# Altium PCB Main.PcbDoc
Units mm, origin at the board's own origin, x right, y up, seen from the top; angles counter-clockwise.
Board outline 49.28 x 20.45 mm, 4 copper layers (Top Layer, L2 (GND), L3 (GND), Bottom Layer), stack 0.567 mm thick; 38 components, 33 nets, 163 pads, 95 vias.
Unrouted connection lines stored in the file: 91.
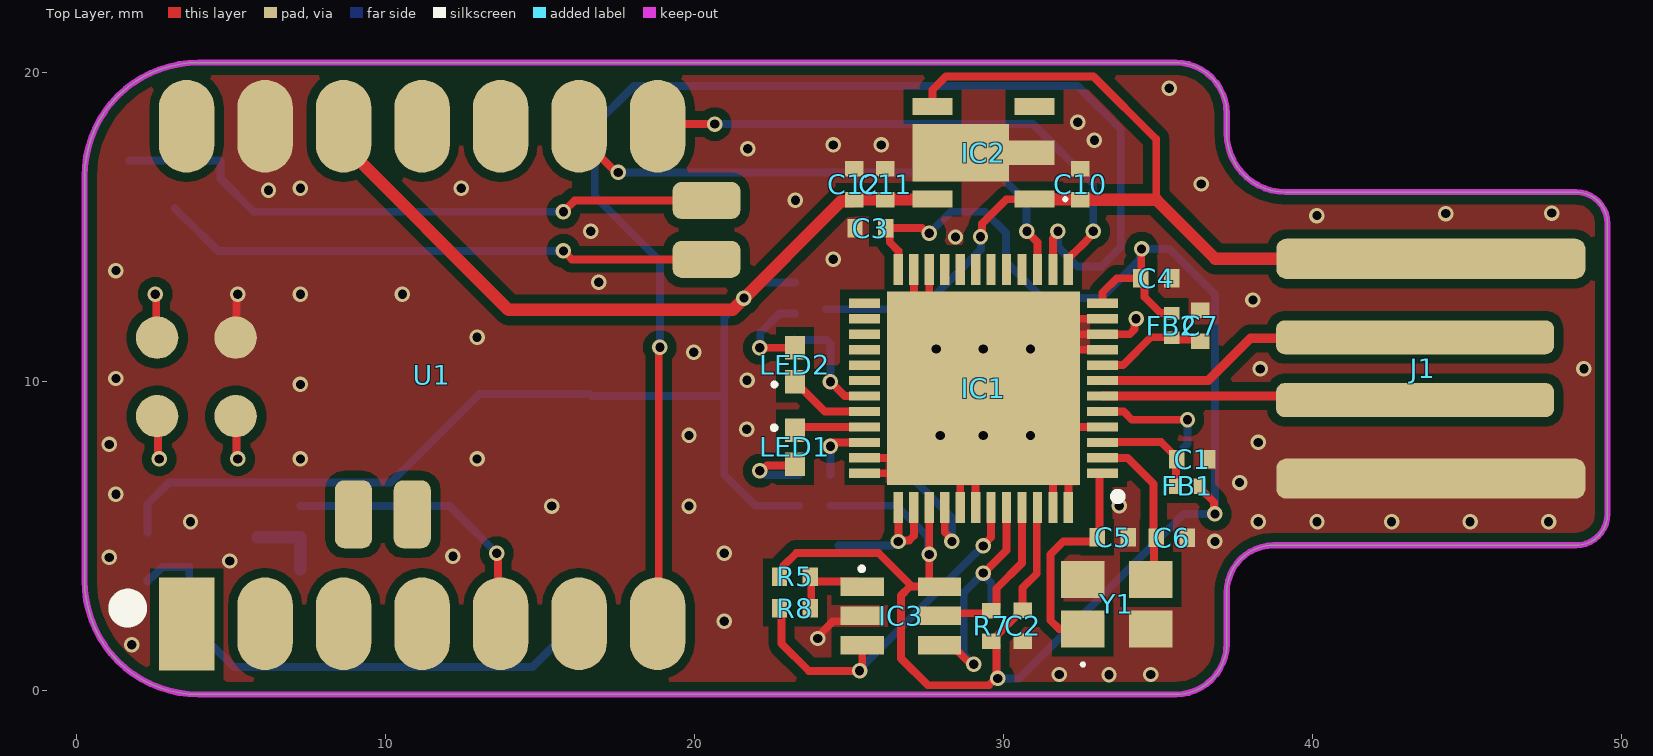
[diagram p0: Top Layer view]
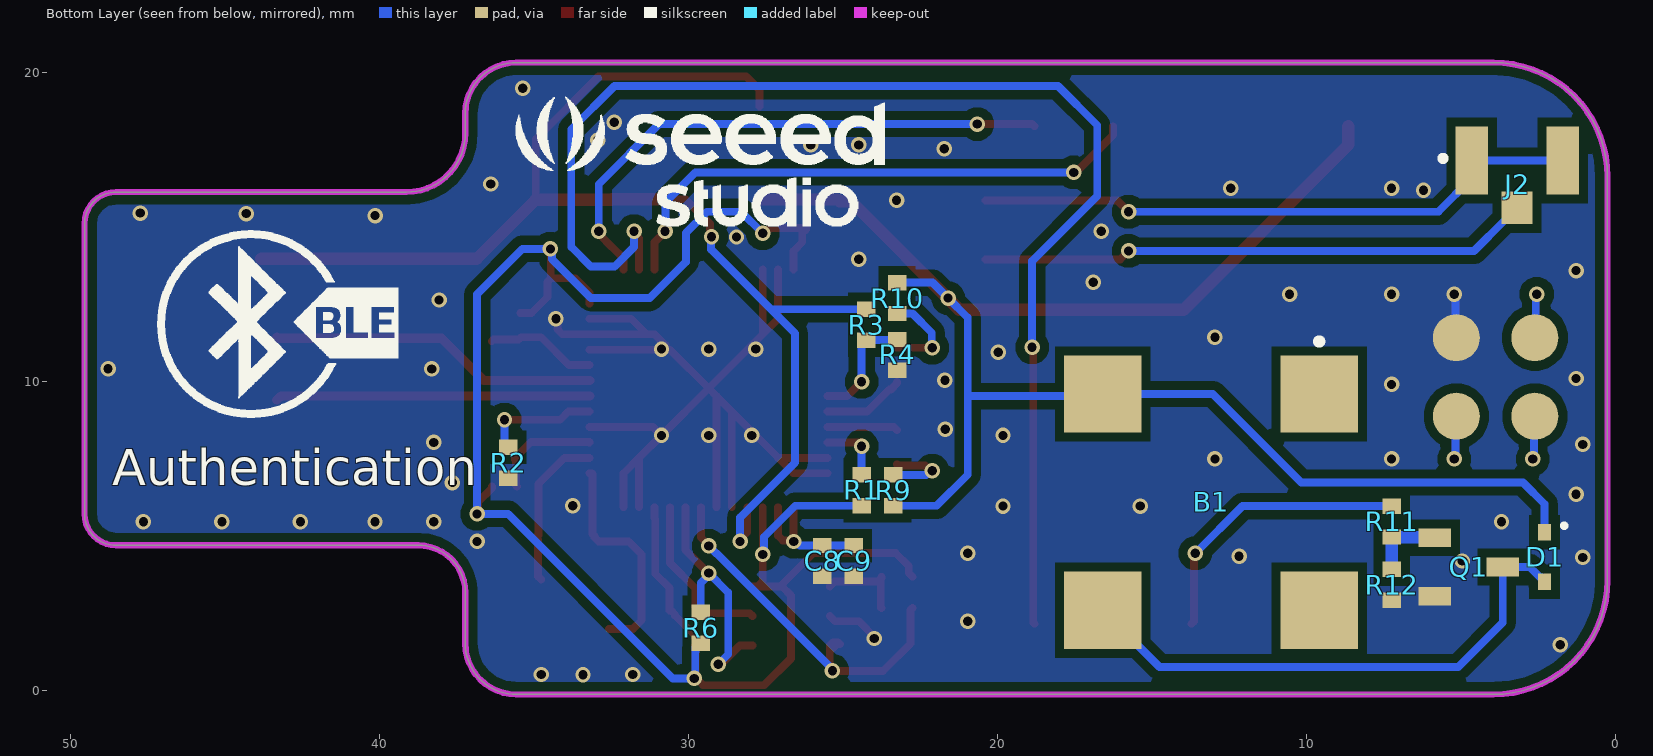
[diagram p1: Bottom Layer view, seen from below]
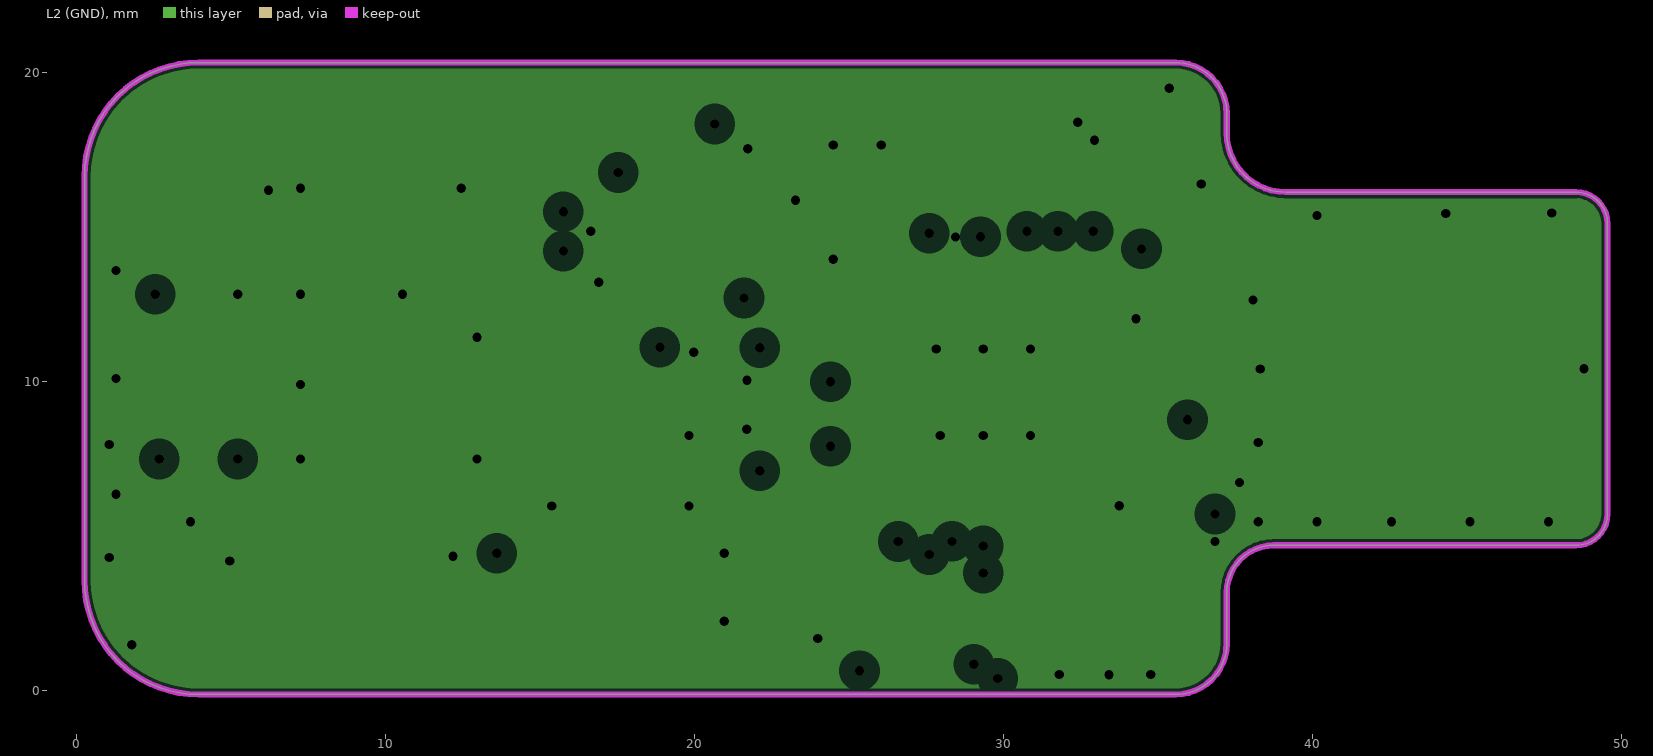
[diagram p2: L2 (GND), clearances drawn from the general rule]
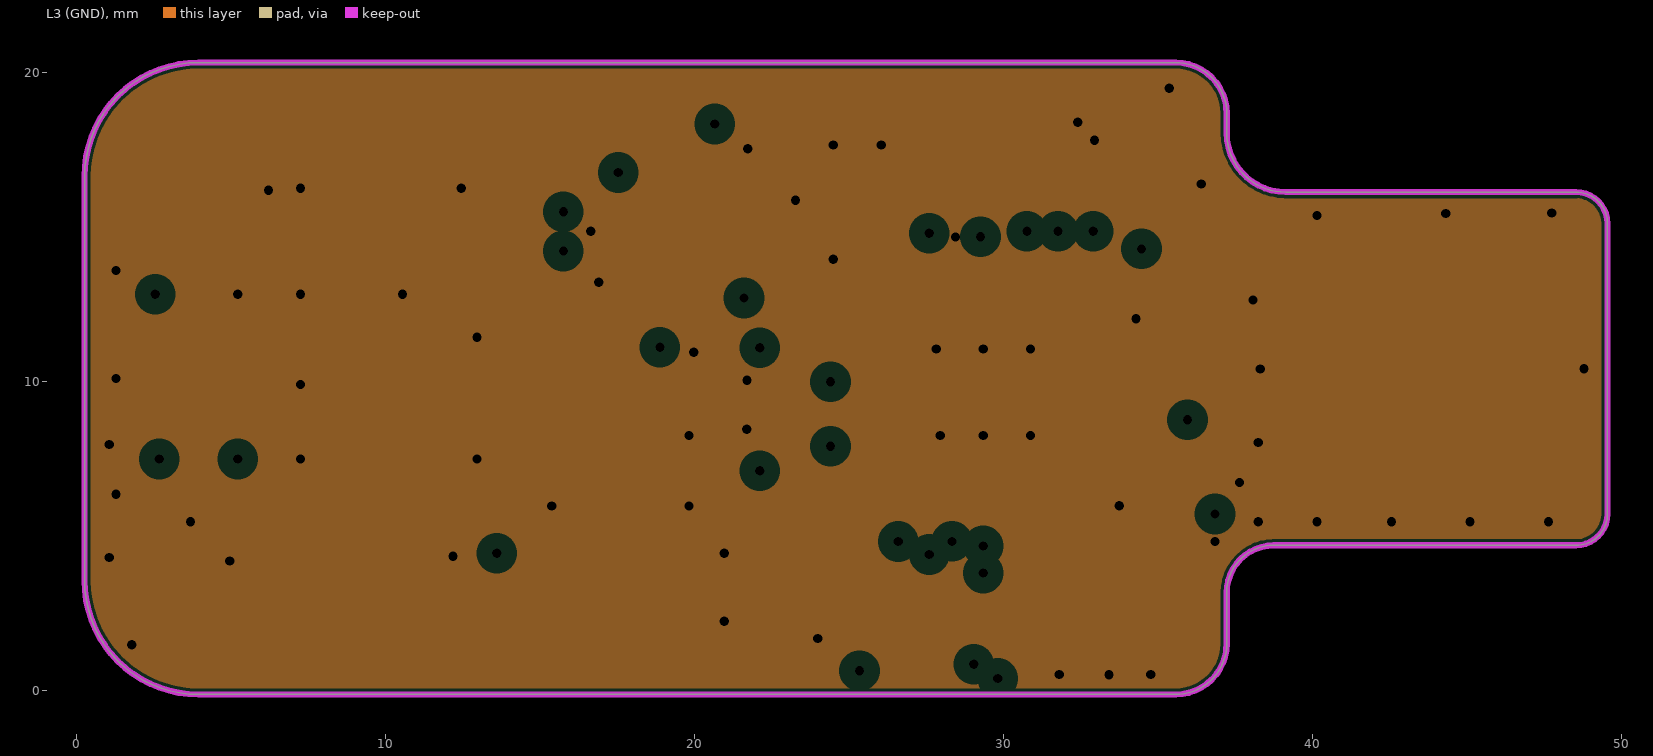
[diagram p3: L3 (GND), clearances drawn from the general rule]

## Layer stack, top to bottom
Top Solder: solder mask 0.0102, Solder Resist, Dk 3.5
Top Layer: signal copper 0.035
Dielectric 2: prepreg 0.0711, PP-006, Dk 4.1
L2 (GND): plane copper 0.0175, net GND
Dielectric 1: dielectric 0.32, FR-4, Dk 4.8
L3 (GND): plane copper 0.0175, net GND
Dielectric 3: prepreg 0.0711, PP-006, Dk 4.1
Bottom Layer: signal copper 0.035
Bottom Solder: solder mask 0.0102, Solder Resist, Dk 3.5

## Board outline
49.53,15.113 49.53,5.715 cw(c48.514,5.715) 48.514,4.699 38.735,4.699 ccw(c38.735,3.175) 37.211,3.175 37.211,1.524 cw(c35.56,1.524) 35.56,-0.127 3.937,-0.127 cw(c3.937,3.556) 0.254,3.556 0.254,16.637 cw(c3.937,16.637) 3.937,20.32 35.56,20.32 cw(c35.56,18.669) 37.211,18.669 37.211,18.034 ccw(c39.116,18.034) 39.116,16.129 48.514,16.129 cw(c48.514,15.113)

## Design rules (kind name [scope] priority, off if disabled: settings)
Clearance Clearance_1 [InNamedPolygon('GND_L01_P004')] p1: gap=0.3 ignorepadtopadclearanceinfootprint=FALSE
Clearance [All] p2: gap=0.3 ignorepadtopadclearanceinfootprint=FALSE
DiffPairsRouting [All] p1: maxlimit=0.254 minlimit=0.25 mostfreqgap=0.25 toplayer_minwidth=0.287 toplayer_maxwidth=0.287 toplayer_prefwidth=0.287 bottomlayer_minwidth=0.287 bottomlayer_maxwidth=0.287 bottomlayer_prefwidth=0.287 maxuncoupledlength=12.7
HoleSize [All] p1: absolutevalues=TRUE maxlimit=2.54 minlimit=0.3 maxpercent=80.000 minpercent=20.000
MinimumSolderMaskSliver [All] p1: minsoldermaskwidth=0.1
PlaneClearance [All] p1: clearance=0.508
PlaneConnect [All] p1: planeconnectstyle=Direct reliefexpansion=0.508 reliefentries=4 reliefconductorwidth=0.254 reliefairgap=0.254
PolygonConnect [All] p1: connectstyle=Direct reliefconductorwidth=0.254 reliefentries=4 polygonreliefangle="90 Angle" airgapwidth=0.254
RoutingVias [All] p1: holewidth=0.5 width=0.7 viastyle="Through Hole" minholewidth=0.3 minwidth=0.5 maxholewidth=6 maxwidth=7
SilkToSolderMaskClearance [IsPad] p1: minsilkscreentomaskgap=0.15 clearancetoexposedcopper=TRUE
SolderMaskExpansion [All] p1: expansion=0.1 istentingtop=FALSE
UnRoutedNet [All] p1: checkbadconnections=TRUE
Width [All] p1: maxlimit=2 minlimit=0.254 preferedwidth=0.4
23 further rules are at their usual default settings.

## Classes and differential pairs
differential pair USB: +USB_P -USB_N

## Components (designator, comment, footprint, x,y, rotation, side; value= is the part's Value field where it differs from the comment)
B1 "Buzzer" CMT8530SSMTTR 13.081,6.096 r0 bottom
C1 "10uF" "CAP 0402_1005" 36.099,7.484 r180 top
C2 "10uF" "CAP 0402_1005" 30.598,2.093 r270 top
C3 "100nF" "CAP 0402_1005" 25.684,14.967 r180 top
C4 "100nF" "CAP 0402_1005" 34.929,13.335 r0 top
C5 "18pF" "CAP 0402_1005" 33.528,4.962 r180 top
C6 "18pF" "CAP 0402_1005" 35.433,4.956 r180 top
C7 "10uF" "CAP 0402_1005" 36.347,11.805 r270 top
C8 "100nF" "CAP 0402_1005" 25.654,4.191 r90 bottom
C9 "100nF" "CAP 0402_1005" 24.638,4.191 r90 bottom
C10 "10uF" "CAP 0402_1005" 32.468,16.383 r270 top
C11 "100nF" "CAP 0402_1005" 26.162,16.383 r270 top
C12 "10uF" "CAP 0402_1005" 25.146,16.383 r270 top
D1 "DIODE" SODFL1608X65N 2.286,4.318 r270 bottom
FB1 "BLM15AX601SN1D" NFZ15SG152SN10B 35.941,6.604 r0 top
FB2 "BLM15AX601SN1D" NFZ15SG152SN10B 35.433,11.811 r90 top
IC1 "FT232HQ-REEL" QFN50P800X800X100-49N-D 29.337,9.779 r180 top locked
IC2 "AP2112R5A-3.3TRG1" AP2112R5A33TRG1 29.337,17.399 r90 top
IC3 "93LC56BT-I_OT" SOT95P270X145-6N 26.67,2.413 r0 top
J1 "USB1046-GF-0190-L-B-A" USB1046GF0190LBA 49.53,4.699 r0 top
J2 "U.FL-R-SMT-1_01_" U.FL-R-SMT(01) 3.175,17.145 r180 bottom
LED1 "150040VS73240" LEDC1005X50N 23.241,7.874 r270 top
LED2 "LW_QH8G-Q2OO-3K5L-1" LEDC1005X40N 23.241,10.541 r90 top
Q1 "2N7002NXAKR" SOT95P230X110-3N 4.742,3.998 r180 bottom
R1 "12K" "RES 0402_1005" 24.384,6.477 r270 bottom
R2 "12K" "RES 0402_1005" 35.814,7.366 r90 bottom
R3 "5.1K" "RES 0402_1005" 24.243,11.835 r90 bottom
R4 "12K" "RES 0402_1005" 23.233,10.858 r90 bottom
R5 "10K" "RES 0402_1005" 23.241,3.683 r180 top
R6 "10K" "RES 0402_1005" 29.591,2.032 r270 bottom
R7 "10K" "RES 0402_1005" 29.598,2.088 r270 top
R8 "2K" "RES 0402_1005" 23.241,2.667 r0 top
R9 "1K" "RES 0402_1005" 23.368,6.477 r90 bottom
R10 "1K" "RES 0402_1005" 23.241,12.7 r270 bottom
R11 "180" "RES 0402_1005" 7.239,5.469 r90 bottom
R12 "10K" "RES 0402_1005" 7.239,3.429 r90 bottom
U1 "nRF52840" XIAO_nRF52840 11.112,9.126 r90 top locked
Y1 "ABM8AIG-12.000MHZ-1Z-TR" ABM8AIG12000MHZ1ZTR 33.655,2.794 r0 top

## Footprints (in the part's own frame and the unit in brackets; to place one, negate y for a bottom-side part, rotate by r counter-clockwise, add the part's x,y. Pads: shape width x height; smd on the part's side, far side on the other; paste and mask are expansions set on the pad)
ABM8AIG12000MHZ1ZTR [mm]
  rect 1.4x1.2 smd: 1(-1.1,-0.8) 2(1.1,-0.8) 3(1.1,0.8) 4(-1.1,0.8)
  silkscreen extent -1.15,-2 -1.05,-1.9, body extent -1.68,-1.28 1.68,1.28, height 0.9
AP2112R5A33TRG1 [mm]
  rect 0.55x1.3 smd: 1(-1.5,-1.65) 3(1.5,-1.65) 4(1.5,1.65) 5(-1.5,1.65)
  rect 0.8x1.475 smd: 2(0,-1.563)
  rect 1.85x3.125 smd: 6(0,0.737)
  silkscreen extent -1.55,-2.7 -1.45,-2.6, body extent -2.25,-1.22 2.25,1.22, height 1.7
"CAP 0402_1005" [mm] "Chip Capacitor, 2-Leads, Body 1.02x0.51mm, IPC Medium Density"
  rect 0.5x0.6 smd: 1(-0.498,0.006) 2(0.502,0.006)
  body extent -0.52,-0.27 0.48,0.25, height 0.52
CMT8530SSMTTR [mm]
  rect 2.5x2.5 smd: 1(-3.5,-3.5) 2(3.5,-3.5) 3(3.5,3.5) 4(-3.5,3.5)
  silkscreen extent -3.6,-5.3 -3.4,-5.1, body extent -4.25,-4.19 4.25,4.31, height 3.01
LEDC1005X40N [mm]
  rect 0.75x0.65 smd: 1(-0.55,0) 2(0.55,0)
  body extent -0.53,-0.25 0.47,0.25, height 0.36
LEDC1005X50N [mm]
  rect 0.75x0.65 smd: 1(-0.55,0) 2(0.55,0)
  body extent -0.5,-0.25 0.5,0.25, height 0.4
NFZ15SG152SN10B [mm]
  rect 0.4x0.5 smd: 1(-0.4,0) 2(0.4,0)
  body extent -0.5,-0.25 0.5,0.25, height 0.5
QFN50P800X800X100-49N-D [mm]
  rect 1x0.3 smd: 1(-3.85,2.75) 2(-3.85,2.25) 3(-3.85,1.75) 4(-3.85,1.25) 5(-3.85,0.75) 6(-3.85,0.25) 7(-3.85,-0.25) 8(-3.85,-0.75) 9(-3.85,-1.25) 10(-3.85,-1.75) 11(-3.85,-2.25) 12(-3.85,-2.75) 25(3.85,-2.75) 26(3.85,-2.25) 27(3.85,-1.75) 28(3.85,-1.25) 29(3.85,-0.75) 30(3.85,-0.25) 31(3.85,0.25) 32(3.85,0.75) 33(3.85,1.25) 34(3.85,1.75) 35(3.85,2.25) 36(3.85,2.75)
  rect 0.3x1 smd: 13(-2.75,-3.85) 14(-2.25,-3.85) 15(-1.75,-3.85) 16(-1.25,-3.85) 17(-0.75,-3.85) 18(-0.25,-3.85) 19(0.25,-3.85) 20(0.75,-3.85) 21(1.25,-3.85) 22(1.75,-3.85) 23(2.25,-3.85) 24(2.75,-3.85) 37(2.75,3.85) 38(2.25,3.85) 39(1.75,3.85) 40(1.25,3.85) 41(0.75,3.85) 42(0.25,3.85) 43(-0.25,3.85) 44(-0.75,3.85) 45(-1.25,3.85) 46(-1.75,3.85) 47(-2.25,3.85) 48(-2.75,3.85)
  rect 6.25x6.25 smd paste-40: 49(0,0)
  silkscreen extent -4.47,3.38 -4.23,3.62, body extent -4.05,-4.05 4.05,4.05, height 1
"RES 0402_1005" [mm] "Chip Resistor, 2-Leads, Body 1.0x0.5mm, IPC Medium Density"
  rect 0.5x0.6 smd: 1(-0.5,0) 2(0.5,0)
  body extent -0.5,-0.25 0.5,0.25, height 0.35
SODFL1608X65N [mm]
  rect 0.53x0.42 smd: 1(-0.8,0) 2(0.8,0)
  body extent -0.8,-0.42 0.8,0.41, height 0.63
SOT95P230X110-3N [mm]
  rect 1.05x0.6 smd: 1(-1.1,0.95) 2(-1.1,-0.95) 3(1.1,0)
  body extent -1.2,-1.45 1.2,1.45, height 0.95
SOT95P270X145-6N [mm]
  rect 1.4x0.6 smd: 1(-1.25,0.95) 2(-1.25,0) 3(-1.25,-0.95) 4(1.25,-0.95) 5(1.25,0) 6(1.25,0.95)
  body extent -1.35,-1.45 1.35,1.45, height 1.45
U.FL-R-SMT(01) [mm]
  rect 1.05x2.2 smd: 1(-1.475,0) 2(1.475,0)
  rect 1x1.05 smd: 3(0,-1.525)
  silkscreen extent -2.46,0.02 -2.35,0.13, body extent -1.76,-1.8 1.24,1.3, height 1.25
USB1046GF0190LBA [mm]
  rrect50% 10x1.3 smd: 1(-5.715,9.271) 4(-5.715,2.159)
  rrect50% 9x1.1 smd: 2(-6.223,6.731) 3(-6.223,4.699)
XIAO_nRF52840 [mm]
  rect 3x1.8 smd: 1(-6.972,7.556)
  oval 3x1.8 smd: 2(-6.967,5.016) 3(-6.967,2.476) 4(-6.967,-0.064) 5(-6.967,-2.604) 6(-6.967,-5.144) 7(-6.967,-7.683) 8(9.134,-7.683) 9(9.134,-5.143) 10(9.134,-2.603) 11(9.134,-0.063) 12(9.134,2.477) 13(9.134,5.017) 14(9.134,7.556)
  round 1.37 smd: 15(2.291,8.509) 16(-0.249,8.509) 17(-0.249,5.969) 18(2.291,5.969)
  rrect50% 2.2x1.2 smd: 19(-3.424,2.159) 20(-3.424,0.254)
  rrect50% 1.2x2.2 smd: 21(4.826,-9.266) 22(6.731,-9.266)
  silkscreen extent -6.59,9.33 -6.33,9.59, body extent -7.75,-10.57 9.75,11.43, height 4.41

## Part data
B1: library part CMT-8530S-SMT-TR, "Speakers & Transducers Buzzer 8.5mm sq 2.73kHz 3.6V SMT", Manufacturer_Name="CUI Devices", Mouser Part Number=490-CMT-8530S-SMT-TR, Datasheet Link=https://datasheet.datasheetarchive.com/originals/distributors/DKDS-12/236652.pdf, Geometry.Height=3mm, Manufacturer_Part_Number=CMT-8530S-SMT-TR, Mouser Price/Stock=https://www.mouser.co.uk/ProductDetail/CUI-Devices/CMT-8530S-SMT-TR/?qs=qCxwlXJ4fnxl6A4lXsnRBQ%3D%3D
C1 C2 C7 C10 C12: library part "Cap 0402", "Multilayer Ceramic Capacitors MLCC - SMD/SMT NEW GLOBAL PN KGM05CR51A106MH 10V 10uF X5R 0402 2mm Pitch 20%", ComponentLink1Description="New link", ComponentLink1URL=https://eu.mouser.com/ProductDetail/KYOCERA-AVX/CM05X5R106M10AH?qs=MyNHzdoqoQKSCgSEDR5Ylg%3D%3D
C3 C4 C8 C9 C11: library part "Cap 0402", "Multilayer Ceramic Capacitors MLCC - SMD/SMT 0402 16VDC 100nF 10% X7R", ComponentLink1Description="New link", ComponentLink1URL=https://eu.mouser.com/ProductDetail/TDK/C1005X7R1C104K050BC?qs=NRhsANhppD%252BhAGOapA8QKQ%3D%3D
C5 C6: library part "Cap 0402", "Multilayer Ceramic Capacitors MLCC - SMD/SMT 16V 18pF X8R 0402 2% AEC-Q200", ComponentLink1Description="New link", ComponentLink1URL=https://eu.mouser.com/ProductDetail/KEMET/C0402C180G4HACAUTO?qs=j%252B1pi9TdxUYvGKJw1Hletg%3D%3D
D1: library part BAS716_115, "Rectifiers DIODE LOW LEAKAGE TAPE-7", Manufacturer_Name=Nexperia, Manufacturer_Part_Number=BAS716,115, Mouser Part Number=771-BAS716-T/R, Datasheet Link=https://assets.nexperia.com/documents/data-sheet/BAS716.pdf, Geometry.Height=0.65mm, Mouser Price/Stock=https://www.mouser.co.uk/ProductDetail/Nexperia/BAS716115?qs=me8TqzrmIYUJEW4Ty445kw%3D%3D
FB1 FB2: "Ferrite Bead", Manufacturer_Name="Murata Electronics", Mouser Part Number=81-BLM15AX601SN1D, Arrow Part Number=BLM15AX601SN1D, Arrow Price/Stock=https://www.arrow.com/en/products/blm15ax601sn1d/murata-manufacturing?region=europe, ComponentLink1Description="New link", ComponentLink1URL=https://eu.mouser.com/ProductDetail/Murata-Electronics/BLM15AX601SN1D?qs=MY6wChARw2zrjX4xpWbUQA%3D%3D, Datasheet Link=http://www.murata.com/~/media/webrenewal/support/library/catalog/products/emc/emifil/c31e.ashx?la=en-gb, Height=0.55mm, Manufacturer_Part_Number=BLM15AX601SN1D, Mouser Price/Stock=https://www.mouser.co.uk/ProductDetail/Murata-Electronics/BLM15AX601SN1D?qs=MY6wChARw2zrjX4xpWbUQA%3D%3D
IC1: "Integrated Circuit", Manufacturer_Name="FTDI Chip", Mouser Part Number=895-FT232HQ-REEL, Arrow Part Number=FT232HQ-REEL, Arrow Price/Stock=https://www.arrow.com/en/products/ft232hq-reel/ftdi-chip?region=nac, Datasheet Link=http://www.ftdichip.com/Support/Documents/DataSheets/ICs/DS_FT232H.pdf, Height=1mm, Manufacturer_Part_Number=FT232HQ-REEL, Mouser Price/Stock=https://www.mouser.co.uk/ProductDetail/FTDI/FT232HQ-REEL?qs=rzPzygjq8vI7%2FlAoU8Mqdw%3D%3D
IC2: "Integrated Circuit", Manufacturer_Name="Diodes Incorporated", Mouser Part Number=621-AP2112R5A-3.3TRG, Datasheet Link=https://www.diodes.com/assets/Datasheets/AP2112.pdf, Height=1.6mm, Manufacturer_Part_Number=AP2112R5A-3.3TRG1, Mouser Price/Stock=https://www.mouser.co.uk/ProductDetail/Diodes-Incorporated/AP2112R5A-3.3TRG1?qs=5V6w%252Be2aIqZ7ofXTuvKxSQ%3D%3D
IC3: "Integrated Circuit", Arrow Part Number=93LC56BT-I/OT, Manufacturer_Name=Microchip, Mouser Part Number=579-93LC56BT-I/OT, Arrow Price/Stock=https://www.arrow.com/en/products/93lc56bt-iot/microchip-technology?region=nac, Datasheet Link=http://ww1.microchip.com/downloads/en/DeviceDoc/21794G.pdf, Height=1.45mm, Manufacturer_Part_Number=93LC56BT-I/OT, Mouser Price/Stock=https://www.mouser.co.uk/ProductDetail/Microchip-Technology/93LC56BT-I-OT?qs=lQv0JY93vrc7B5Rh5LPW8g%3D%3D
J1: "Connector", Manufacturer_Name="GCT (GLOBAL CONNECTOR TECHNOLOGY)", Mouser Part Number=640-USB1046GF0190LBA, Datasheet Link=https://gct.co/files/drawings/usb1046.pdf?v=ccb5d20d-0631-4297-aa3c-9c34fccf9fbc, Height=7.2mm, Manufacturer_Part_Number=USB1046-GF-0190-L-B-A, Mouser Price/Stock=https://www.mouser.co.uk/ProductDetail/GCT/USB1046-GF-0190-L-B-A?qs=KUoIvG%2F9IlbZOJtEsn1unA%3D%3D
J2: "Connector", Arrow Part Number=U.FL-R-SMT-1(01), Manufacturer_Name=Hirose, Mouser Part Number=798-UFLRSMT101, Antenna Link=https://www.seeedstudio.com/NFC-Antenna-p-1805.html, Arrow Price/Stock=https://www.arrow.com/en/products/u.fl-r-smt-1-01/hirose-electric, Datasheet Link=https://datasheet.datasheetarchive.com/originals/distributors/SFDatasheet-1/sf-00023454.pdf, Manufacturer_Part_Number=U.FL-R-SMT-1(01), Mouser Price/Stock=https://www.mouser.co.uk/ProductDetail/Hirose-Connector/U.FL-R-SMT-101?qs=PABxe4V6HDpNsmXV6XKIVg%3D%3D
LED1: "LED", Manufacturer_Name="Wurth Elektronik", Mouser Part Number=710-150040VS73240, ComponentLink1Description="New link", ComponentLink1URL=https://eu.mouser.com/ProductDetail/Wurth-Elektronik/150040VS73240?qs=8Aam6%252B7C6HEhyesRm%252BQyFQ%3D%3D, Datasheet Link=https://katalog.we-online.de/led/datasheet/150040VS73240.pdf, Height=0.5mm, Manufacturer_Part_Number=150040VS73240, Mouser Price/Stock=https://www.mouser.co.uk/ProductDetail/Wurth-Elektronik/150040VS73240?qs=8Aam6%252B7C6HEhyesRm%252BQyFQ%3D%3D
LED2: "LED", Arrow Part Number="LW QH8G-Q2OO-3K5L-1", Manufacturer_Name=OSRAM, Mouser Part Number=720-LWQH8G-Q2S2-3K5L, Arrow Price/Stock=https://www.arrow.com/en/products/lwqh8g-q2oo-3k5l-1/osram-opto-semiconductors, ComponentLink1Description="New link", ComponentLink1URL=https://eu.mouser.com/ProductDetail/ams-OSRAM/LW-QH8G-Q2OO-3K5L-1?qs=74fRo9GAWsx4kLMtacmiJQ%3D%3D, Datasheet Link=https://datasheet.datasheetarchive.com/originals/distributors/DKDS41/DSANUWW0036552.pdf, Height=0.4mm, Manufacturer_Part_Number="LW QH8G-Q2OO-3K5L-1", Mouser Price/Stock=https://www.mouser.co.uk/ProductDetail/OSRAM-Opto-Semiconductors/LW-QH8G-Q2OO-3K5L-1?qs=74fRo9GAWsx4kLMtacmiJQ%3D%3D
Q1: "MOSFET (N-Channel)", Manufacturer_Name=Nexperia, Mouser Part Number=771-2N7002NXAKR, Arrow Part Number=2N7002NXAKR, Arrow Price/Stock=https://www.arrow.com/en/products/2n7002nxakr/nexperia?region=europe, ComponentLink1Description="New link", ComponentLink1URL=https://eu.mouser.com/ProductDetail/Nexperia/2N7002NXAKR?qs=%252B6g0mu59x7JoAsZYPFXqhw%3D%3D, Datasheet Link=https://assets.nexperia.com/documents/data-sheet/2N7002NXAK.pdf, Height=1.1mm, Manufacturer_Part_Number=2N7002NXAKR, Mouser Price/Stock=https://www.mouser.co.uk/ProductDetail/Nexperia/2N7002NXAKR?qs=%252B6g0mu59x7JoAsZYPFXqhw%3D%3D
R1 R2 R4: library part "Res 0402", "Thin Film Resistors - SMD 12kOhm,0402,1%,50ppm ,63mW,50V", ComponentLink1Description="New link", ComponentLink1URL=https://eu.mouser.com/ProductDetail/KOA-Speer/RN73H1ETTP1202F50?qs=9tvNVxbbcEoiTActxcuNwQ%3D%3D
R3: library part "Res 0402", "Thin Film Resistors - SMD 5.1K OHM 1% 50PPM 1/16W", ComponentLink1Description="New link", ComponentLink1URL=https://eu.mouser.com/ProductDetail/YAGEO/RT0402FRE075K1L?qs=gY0y7AQI9SP4FZkrbB0g%252BA%3D%3D
R5 R6 R7 R11 R12: library part "Res 0402", "Thin Film Resistors - SMD 0402 10kOhms 1 % 50P PM 62.5mW AECQ200", ComponentLink1Description="New link"
  R5 R6 R7 R12: ComponentLink1URL=https://eu.mouser.com/ProductDetail/YAGEO/AT0402FRE0710KL?qs=vJF2aRtctcDtRwXKNC56yw%3D%3D
  R11: ComponentLink1URL=https://eu.mouser.com/ProductDetail/YAGEO/RT0402FRE07180RL?qs=gY0y7AQI9SMchP6eHg8a2Q%3D%3D
R8: library part "Res 0402", "Thin Film Resistors - SMD 0402 2.0Kohm .5% AEC-Q200", ComponentLink1Description="New link", ComponentLink1URL=https://eu.mouser.com/ProductDetail/Panasonic/ERA-2AED202X?qs=nho8PGNfA6q9QhdQjXIGFg%3D%3D
R9 R10: library part "Res 0402", "Thin Film Resistors - SMD 1K ohm 1% 1/16W", ComponentLink1Description="New link", ComponentLink1URL=https://eu.mouser.com/ProductDetail/YAGEO/RT0402FRE071KL?qs=BXCcY9r%252B08AJmLKodK5LLA%3D%3D
U1: library part "XIAO nRF52840"
Y1: "Crystals AEC-Q200 CRYSTAL 12.000MHZ 18PF SMD", Manufacturer_Name=ABRACON, Mouser Part Number=815-M8AIG-12-1ZT, ComponentLink1Description="New link", ComponentLink1URL=https://eu.mouser.com/ProductDetail/ABRACON/ABM8AIG-12.000MHZ-1Z-T?qs=uwxL4vQweFO5XCxMHCFfeA%3D%3D, Datasheet Link=https://abracon.com/AIGcrystals/ABM8AIG.pdf, Height=0.8mm, Manufacturer_Part_Number=ABM8AIG-12.000MHZ-1Z-TR, Mouser Price/Stock=https://www.mouser.co.uk/ProductDetail/ABRACON/ABM8AIG-12.000MHZ-1Z-TR?qs=t7xnP681wgVIFBgGyVZCbw%3D%3D

## Free pads (board coordinates)
  round 1.524 smd far side: 1(2.603,8.877) 1(2.603,11.417) 1(5.143,8.877) 1(5.143,11.417)

## Via types
v1: diameter 0.5, hole 0.3, Top Layer to Bottom Layer, tented both sides, 95 vias

## Nets (pads, with @x,y where several pads share a name; then routed paths per layer and width w, separated by ;. In a path a pad name is that pad's centre, name@x,y a point inside that pad or via, vN(x,y) a via of type N, cw(c..) or ccw(c..) an arc to the next point about the centre after c; other vN are vias at no path point)
3V3: B1.2 C11.2 C12.2 D1.1 IC2.5 R9.1 R10.1 U1.12 | length 55.1
  Top Layer w0.4: U1.12 8.636,17.66 13.977,12.319 21.222,12.319 24.735,15.831 25.102,15.831 C12.2 ; C12.2@25.161,15.89 27.678,15.89 IC2.5
  Bottom Layer w0.254: D1.1 2.286,6.032 2.984,6.731 10.16,6.731 13.025,9.596 B1.2 16.652,9.525 20.955,9.525 ; R10.1 22.09,13.2 v1(21.59,12.7) 20.955,12.065 20.955,9.525 ; R9.1 21.963,5.977 20.955,6.985 20.955,9.525
ACBUS8: IC1.32 LED2.1 | length 2.7
  Top Layer w0.254: LED2.1 23.241,9.941 23.439,9.743 23.489,9.743 24.203,9.029 IC1.32
ACBUS9: IC1.33 LED1.1 | length 2.3
  Top Layer w0.254: LED1.1 23.346,8.529 IC1.33
Buzzer: R11.2 U1.5 | length 9.3
  Top Layer w0.254: v1(13.589,4.445) 13.636,4.398 13.636,2.239 U1.5
  Bottom Layer w0.254: R11.2 12.065,5.969 v1(13.589,4.445)
CLK: pad.1@2.603,11.417 U1.15 | length 2.9
  Top Layer w0.254: v1(2.54,12.827) 2.572,12.795 2.572,11.449 U1.15
  Bottom Layer w0.254: v1(2.54,12.827) 2.572,12.795 2.572,11.449 pad.1@2.603,11.417
DIO: pad.1@2.603,8.877 U1.16 | length 2.8
  Top Layer w0.254: U1.16 2.635,8.846 2.635,7.525 v1(2.667,7.493)
  Bottom Layer w0.254: pad.1@2.603,8.877 2.635,8.846 2.635,7.525 v1(2.667,7.493)
EECLK: IC1.44 IC3.4 R6.1 | length 8.5
  Top Layer w0.254: IC3.4 28.32,1.463 28.885,0.898 28.979,0.898 v1(29.026,0.851) ; v1@29.337,3.79 30.087,4.54 IC1.44
  Bottom Layer w0.254: v1(29.026,0.851) 28.702,1.176 28.702,3.167 v1(29.337,3.802) 29.337,3.735 29.591,3.481 R6.1
EECS: IC1.45 IC3.5 R7.1 | length 5.5
  Top Layer w0.254: IC3.5 28.008,2.501 29.425,2.501 29.449,2.525 29.449,2.588 R7.1 ; R7.1@29.598,2.711 29.767,2.711 29.767,3.305 30.587,4.126 IC1.45
EEDATA: IC1.43 IC3.3 R8.1 | length 12.5
  Top Layer w0.254: R8.1 22.804,2.604 22.804,1.518 23.685,0.637 v1(25.331,0.637) ; IC3.3@25.082,1.498 25.146,1.561 25.322,1.561 IC3.3 25.42,1.359 v1@25.42,0.792 ; IC3.3@25.146,1.544 IC3.3@25.331,1.359 ; v1(29.337,4.679) 29.337,4.712 29.587,4.962 IC1.43
  Bottom Layer w0.254: v1(25.331,0.637) 25.331,0.688 29.076,4.433 29.091,4.433 v1(29.337,4.679)
GND: C1.1 C2.2 C3.2 C4.2 C5.1 C6.1 C7.1 C8.1 C9.1 C10.1 C11.1 C12.1 IC1.4 IC1.9 IC1.10 IC1.11 IC1.22 IC1.23 IC1.35 IC1.36 IC1.41 IC1.42 IC1.47 IC1.48 IC1.49 IC2.2 IC2.6 IC3.2 J1.4 pad.1@5.143,11.417 Q1.2 R2.1 R4.1 R12.1 U1.13 U1.18 Y1.2 Y1.4 | length 44.3
  Top Layer w0.254: U1.18 5.175,11.449 5.175,12.795 v1(5.207,12.827) ; v1(23.975,1.684) 23.975,1.744 24.471,2.24 25.247,2.24 IC3.2 ; IC1.36 26.587,7.029 IC1.49@27.087,7.529 ; IC1.35 IC1.49@27.087,7.529 ; IC1.23 27.087,12.029 IC1.49@27.587,11.529 ; IC1.22 IC1.49@27.587,11.529 ; IC1.41 IC1.49@28.587,9.029 ; IC1.42 IC1.49@29.087,9.529 ; IC1.49@30.734,11.176 31.087,11.529 IC1.49@31.341,11.529 ; IC1.47 IC1.49@31.587,7.529 ; IC1.48 32.087,7.029 IC1.49@31.587,7.529 ; IC1.4 31.135,8.529 v1(30.861,8.255) ; IC1.9 30.587,11.029 IC1.49 ; IC1.11 31.841,12.029 IC1.49@31.341,11.529 ; v1(34.277,12.029) 34.23,11.982 34.23,11.688 34.071,11.529 IC1.10 IC1.49@31.341,11.529 ; IC1.49@27.087,7.529 IC1.49@28.587,9.029 ; IC1.49@27.587,11.529 IC1.49 ; IC1.49@28.587,9.029 IC1.49@29.087,9.529 ; IC1.49@29.087,9.529 IC1.49 ; IC1.49 v1(30.861,8.255) ; v1(30.861,8.255) IC1.49@31.587,7.529
  Bottom Layer w0.254: pad.1@5.143,11.417 5.175,11.449 5.175,12.795 v1(5.207,12.827)
  other v1: 31.788,0.52 33.401,0.508 34.755,0.52 1.781,1.482 20.955,2.24 4.953,4.191 1.052,4.307 12.173,4.342 20.955,4.445 36.83,4.826 3.683,5.461 38.227,5.461 40.132,5.461 42.545,5.461 45.085,5.461 47.625,5.461 15.367,5.969 19.812,5.969 33.736,5.976 1.27,6.35 37.628,6.731 7.239,7.493 12.954,7.493 1.052,7.963 38.227,8.029 19.812,8.255 27.94,8.255 29.337,8.255 21.684,8.453 7.239,9.906 21.69,10.041 1.27,10.096 38.294,10.406 48.768,10.414 19.967,10.948 27.813,11.049 29.337,11.049 30.861,11.049 12.954,11.43 38.058,12.636 7.239,12.827 10.541,12.827 16.891,13.208 1.27,13.589 24.481,13.952 28.435,14.675 16.637,14.859 40.13,15.367 44.3,15.435 47.731,15.448 23.257,15.865 6.206,16.185 7.239,16.256 12.446,16.256 36.39,16.39 21.71,17.53 24.481,17.654 26.035,17.654 32.93,17.803 32.391,18.389 35.354,19.484
MCU_RX: IC1.13 U1.8 | length 18
  Top Layer w0.254: U1.8 18.866,18.331 v1(20.649,18.331) ; IC1.13 32.087,13.979 32.469,14.361 32.477,14.361 32.846,14.73 32.846,14.812 v1(32.893,14.859)
  Bottom Layer w0.254: v1(20.649,18.331) 30.945,18.331 32.893,16.383 v1(32.893,14.859)
MCU_TX: IC1.14 U1.7 | length 43.3
  Top Layer w0.254: U1.7 18.833,2.196 18.833,11.072 v1(18.871,11.11) ; IC1.14 31.587,14.629 31.75,14.792 v1(31.75,14.859)
  Bottom Layer w0.254: v1(18.871,11.11) 18.871,13.895 16.764,16.002 16.764,18.288 18.034,19.558 32.385,19.558 33.782,18.161 33.782,14.356 33.142,13.716 32.385,13.716 31.75,14.351 v1(31.75,14.859)
NetB1_3: B1.3 D1.2 Q1.3 | length 17.7
  Bottom Layer w0.254: D1.2 2.286,3.573 2.369,3.656 2.424,3.656 2.762,3.994 3.638,3.994 Q1.3 3.642,2.2 5.08,0.762 14.747,0.762 B1.3
NetC8_2: C8.2 C9.2 IC1.37 IC1.38 | length 4.6
  Top Layer w0.254: v1(26.584,4.823) v1@26.587,4.826 ; IC1.37 v1@26.587,4.826 ; IC1.38 27.087,5.008 26.938,4.859 26.62,4.859 v1@26.587,4.826
  Bottom Layer w0.254: C9.2 C8.2 26.387,4.693 26.517,4.823 v1(26.584,4.823)
NetIC1_5: IC1.5 R2.2 | length 3.8
  Top Layer w0.254: IC1.5 33.876,9.029 34.142,8.763 v1(35.941,8.763)
  Bottom Layer w0.254: R2.2 35.818,7.866 35.941,7.989 v1(35.941,8.763)
NetIC1_31: IC1.31 R3.1 R4.2 | length 3.7
  Top Layer w0.254: v1(24.388,9.991) 24.85,9.529 IC1.31
  Bottom Layer w0.254: R4.2 23.244,11.347 24.231,11.347 R3.1 24.265,11.335 24.388,11.212 v1(24.388,9.991)
NetIC1_34: IC1.34 R1.1 | length 2
  Top Layer w0.254: v1@24.388,8.029 IC1.34
  Bottom Layer w0.254: R1.1 24.386,6.979 24.386,7.9 v1(24.388,7.902)
NetIC3_1: IC3.1 R5.1 R8.2 | length 2.8
  Top Layer w0.254: R8.2 23.765,2.691 R5.1@23.765,3.622 ; R5.1 23.741,3.646 23.864,3.523 23.941,3.523 25.26,3.523 IC3.1
NetJ2_1: J2.1 J2.2 U1.22 | length 19.8
  Top Layer w0.254: v1(15.748,15.494) 16.111,15.857 U1.22
  Bottom Layer w0.254: J2.2 J2.1 4.65,16.57 5.726,15.494 v1(15.748,15.494)
NetJ2_3: J2.3 U1.21 | length 17.9
  Top Layer w0.254: v1(15.748,14.224) 16.02,13.952 U1.21
  Bottom Layer w0.254: J2.3 3.175,15.595 3.548,15.222 3.573,15.222 4.571,14.224 v1(15.748,14.224)
NetLED1_2: LED1.2 R9.2 | length 2.6
  Top Layer w0.254: v1(22.098,7.112) 22.165,7.112 22.334,7.282 23.199,7.282 LED1.2
  Bottom Layer w0.254: v1(22.098,7.112) 22.165,7.112 22.3,6.977 R9.2
NetLED2_2: LED2.2 R10.2 | length 3
  Top Layer w0.254: v1(22.098,11.091) LED2.2
  Bottom Layer w0.254: v1(22.098,11.091) 22.117,11.11 22.117,11.576 22.741,12.2 R10.2
NetQ1_1: Q1.1 R11.1 R12.2 | length 2.4
  Bottom Layer w0.254: Q1.1 Q1.1@5.853,4.959 ; R11.1@7.228,4.959 R11.1
  Bottom Layer w0.4: Q1.1@5.853,4.959 R11.1@7.228,4.959 ; R12.2 R11.1
RST: pad.1@5.143,8.877 U1.17 | length 2.8
  Top Layer w0.254: U1.17 5.175,8.846 5.175,7.525 v1(5.207,7.493)
  Bottom Layer w0.254: pad.1@5.143,8.877 5.175,8.846 5.175,7.525 v1(5.207,7.493)
RTS: IC1.15 U1.9 | length 18
  Top Layer w0.254: U1.9 16.256,17.967 17.459,16.764 v1(17.526,16.764) ; v1(30.745,14.86) 30.745,14.848 31.087,14.506 IC1.15
  Bottom Layer w0.254: v1(17.526,16.764) 29.767,16.764 30.734,15.797 30.734,14.871 v1(30.745,14.86)
SI: C5.2 IC1.1 Y1.1 | length 7.2
  Top Layer w0.254: Y1.1 31.788,1.994 31.505,2.277 31.505,4.404 31.927,4.826 32.903,4.826 33.026,4.949 33.026,5.006 33.091,5.071 33.091,7.006 33.114,7.029 IC1.1
SO: C6.2 IC1.2 Y1.3 | length 5.2
  Top Layer w0.254: IC1.2 34,7.529 34.845,6.684 34.845,5.037 C6.2 34.854,4.873 34.854,3.693 Y1.3
USB_5V: C10.2 IC1.40 IC2.1 IC2.4 J1.1 R3.2 | length 42.9
  Top Layer w0.254: IC2.4 27.687,19.431 28.124,19.868 32.903,19.868 34.929,17.842 34.929,15.881 ; IC1.40 28.087,5.125 28.321,4.891 v1(28.321,4.826) ; v1(29.244,14.679) 29.291,14.726 29.291,15.103 30.087,15.899 IC2.1
  Top Layer w0.4: IC2.1 32.456,15.899 C10.2 34.929,15.881 36.84,13.97 J1.1
  Bottom Layer w0.254: R3.2 27.321,12.335 ; v1(28.321,4.826) 28.321,5.596 26.543,7.374 26.543,11.557 27.321,12.335 ; v1(29.244,14.679) 29.262,14.661 29.262,14.276 27.321,12.335
USB_N: IC1.6 J1.3 | length 10.2
  Top Layer w0.3: IC1.6 43.176,9.529 J1.3
USB_P: IC1.7 J1.2 | length 10.7
  Top Layer w0.3: IC1.7 36.613,10.029 37.981,11.397 43.274,11.397 J1.2
VCC: C2.1 C3.1 C4.1 FB1.2 FB2.2 IC1.12 IC1.24 IC1.39 IC1.46 IC3.6 R1.2 R5.2 R6.2 R7.2 | length 64.1
  Top Layer w0.254: R5.2 22.864,3.806 22.864,4.027 23.282,4.445 25.95,4.445 27.032,3.363 ; IC1.24 26.587,14.224 26.306,14.505 26.306,14.792 26.183,14.915 C3.1 27.351,14.961 27.52,14.792 v1(27.587,14.792) ; IC1.39 v1(27.587,4.404) 27.587,3.536 IC3.6@27.76,3.363 ; IC3.6 IC3.6@27.76,3.363 ; v1@29.762,0.411 29.762,1.465 29.639,1.588 R7.2 29.648,1.588 29.771,1.711 29.771,1.772 30.431,2.432 30.431,2.468 30.554,2.591 C2.1@30.59,2.591 ; v1(29.802,0.391) 29.735,0.391 29.515,0.171 27.543,0.171 26.674,1.04 26.674,3.078 26.959,3.363 IC3.6@27.76,3.363 ; C2.1 30.604,3.324 31.063,3.783 31.063,5.434 31.064,5.436 31.064,5.556 31.087,5.579 IC1.46 ; IC1.12 33.187,12.867 33.661,13.341 C4.1 ; v1(34.456,14.29) 34.443,14.278 34.443,13.353 C4.1 ; FB2.2 35.073,12.211 34.554,12.73 34.554,13.218 C4.1 ; FB1.2 36.341,6.554 36.803,6.092 36.803,5.742 v1(36.83,5.715)
  Bottom Layer w0.254: R1.2 26.535,5.977 27.54,4.972 27.54,4.451 v1(27.587,4.404) ; v1(27.587,14.792) 28.289,15.494 29.386,15.494 30.07,14.81 30.07,13.872 31.242,12.7 33.147,12.7 34.409,13.962 34.409,14.243 v1(34.456,14.29) 35.364,14.29 36.83,12.824 v1(36.83,5.715) 35.824,5.715 30.5,0.391 v1(29.802,0.391) 29.772,0.421 29.772,1.26 29.764,1.268 29.764,1.409 29.641,1.532 R6.2
VPHY: C1.2 FB1.1 IC1.3 | length 3.6
  Top Layer w0.254: IC1.3 33.195,8.037 35.088,8.037 35.598,7.528 C1.2 35.569,7.449 35.569,6.632 FB1.1
VPLL: C7.2 FB2.1 IC1.8 | length 3.6
  Top Layer w0.254: IC1.8 33.854,10.529 34.755,11.43 35.414,11.43 FB2.1 35.487,11.357 36.299,11.357 C7.2
pads on no net: B1.1 B1.4 IC1.16 IC1.17 IC1.18 IC1.19 IC1.20 IC1.21 IC1.25 IC1.26 IC1.27 IC1.28 IC1.29 IC1.30 IC2.3 U1.1 U1.2 U1.3 U1.4 U1.6 U1.10 U1.11 U1.14 U1.19 U1.20

## Polygon pours and split planes (outlines as drawn)
GND on Bottom Layer "GND_L04_P006" (solid, remove dead copper, pour order 6): 49.53,15.113 49.53,5.715 cw(c48.514,5.715) 48.514,4.699 38.735,4.699 ccw(c38.735,3.175) 37.211,3.175 37.211,1.524 cw(c35.56,1.524) 35.56,-0.127 3.937,-0.127 cw(c3.937,3.556) 0.254,3.556 0.254,16.637 cw(c3.937,16.637) 3.937,20.32 35.56,20.32 cw(c35.56,18.669) 37.211,18.669 37.211,18.034 ccw(c39.116,18.034) 39.116,16.129 48.514,16.129 cw(c48.514,15.113)
GND on Top Layer "GND_L01_P005" (solid, remove dead copper, pour order 5): 49.53,15.113 49.53,5.715 cw(c48.514,5.715) 48.514,4.699 38.735,4.699 ccw(c38.735,3.175) 37.211,3.175 37.211,1.524 cw(c35.56,1.524) 35.56,-0.127 3.937,-0.127 cw(c3.937,3.556) 0.254,3.556 0.254,16.637 cw(c3.937,16.637) 3.937,20.32 35.56,20.32 cw(c35.56,18.669) 37.211,18.669 37.211,18.034 ccw(c39.116,18.034) 39.116,16.129 48.514,16.129 cw(c48.514,15.113)
GND on L3 (GND) (split plane): 175 vertices, not listed, extent 0.455,0.074 49.329,20.119
GND on L2 (GND) (split plane): 175 vertices, not listed, extent 0.455,0.074 49.329,20.119

## Keep-outs
Keep-Out Layer:
  the board outline again, w0.2

## Other copper
Top Layer:
  pour cut-out: 33.583,12.122 33.583,10.979 32.786,10.979 32.784,12.122
  pour cut-out: 24.843,7.579 24.843,6.677 24.827,6.661 24.845,6.644 26.183,6.644 26.183,7.643 26.195,7.655
  pour cut-out: 28.443,6.649 29.276,6.649 29.276,5.127 29.252,5.103 29.228,5.127 28.443,5.127
  pour cut-out: 31.533,6.65 32.66,6.65 32.66,5.252 31.512,5.252 31.464,5.204
  pour cut-out: 27.807,14.408 26.894,14.408 26.797,14.311 26.797,12.901 27.865,12.901 27.865,14.234 27.778,14.321
  pour cut-out: 17.493,16.764 16.02,16.764 16.02,15.949 16.111,15.857 17.526,15.857
  pour cut-out: 36.953,10.754 36.953,10.552 37.017,10.488 36.558,10.029 33.818,10.029 33.818,10.493 34.755,11.43 35.414,11.43 35.514,11.33 36.326,11.33

## Silkscreen, mask and mechanical layers (free items; w line width, h text height)
Top Overlay:
  circle w0.254: c25.4,3.937 r0.01
  circle w0.254: c22.565,8.501 r0.01
  lines w0.254: 22.571,9.898 ccw(c22.565,9.906) 22.575,9.906
Bottom Overlay:
  drawing of 22 lines, arcs and shapes, not listed
  text "Authentication" at 48.639,6.247 h2
Bottom Solder:
  text "designed by" at 14.732,18.2 h1.5
  text "Hamid Sheibani" at 16.047,16.668 h1.5